# EAGLE board xen_mini (EAGLE 5.10)
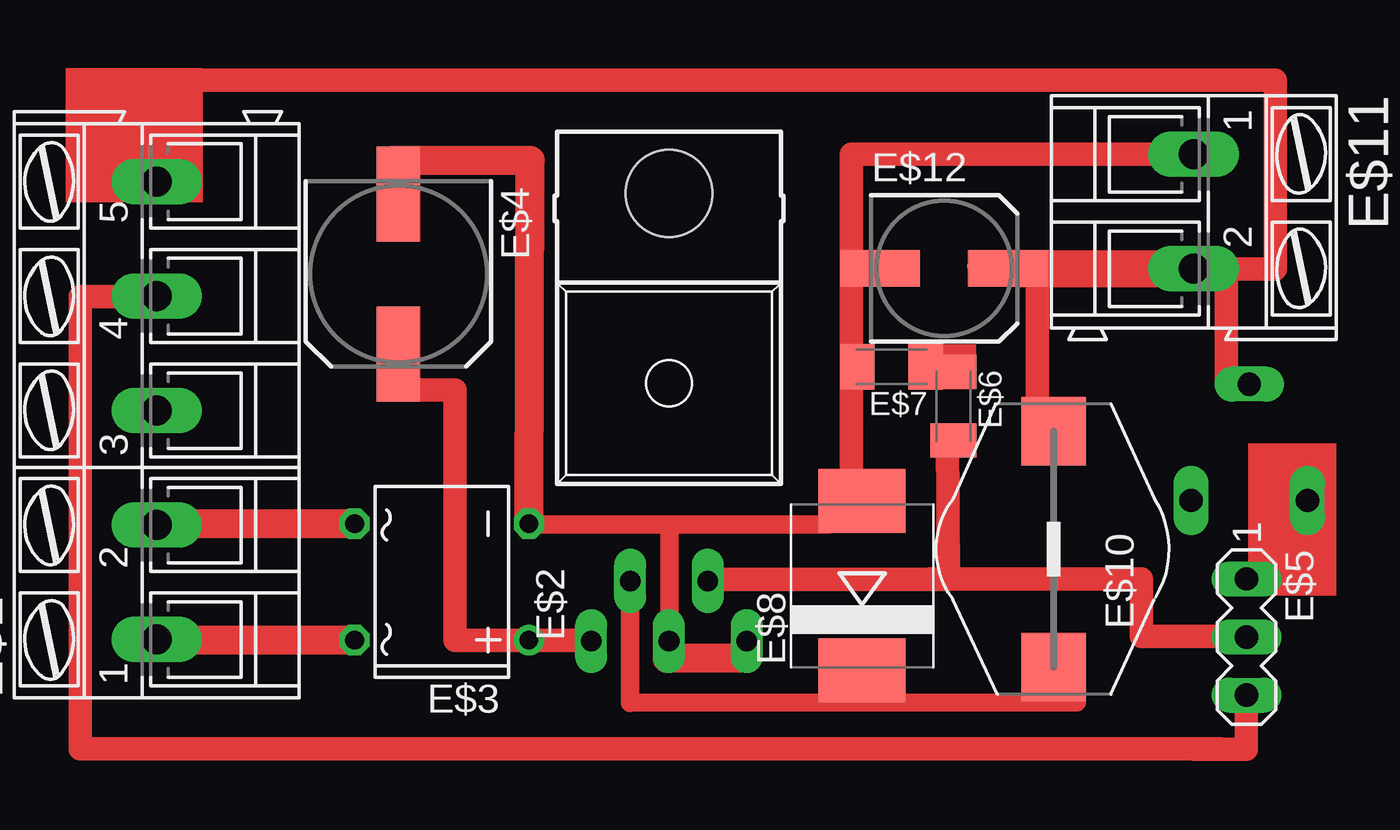
[diagram p0: board, top side]
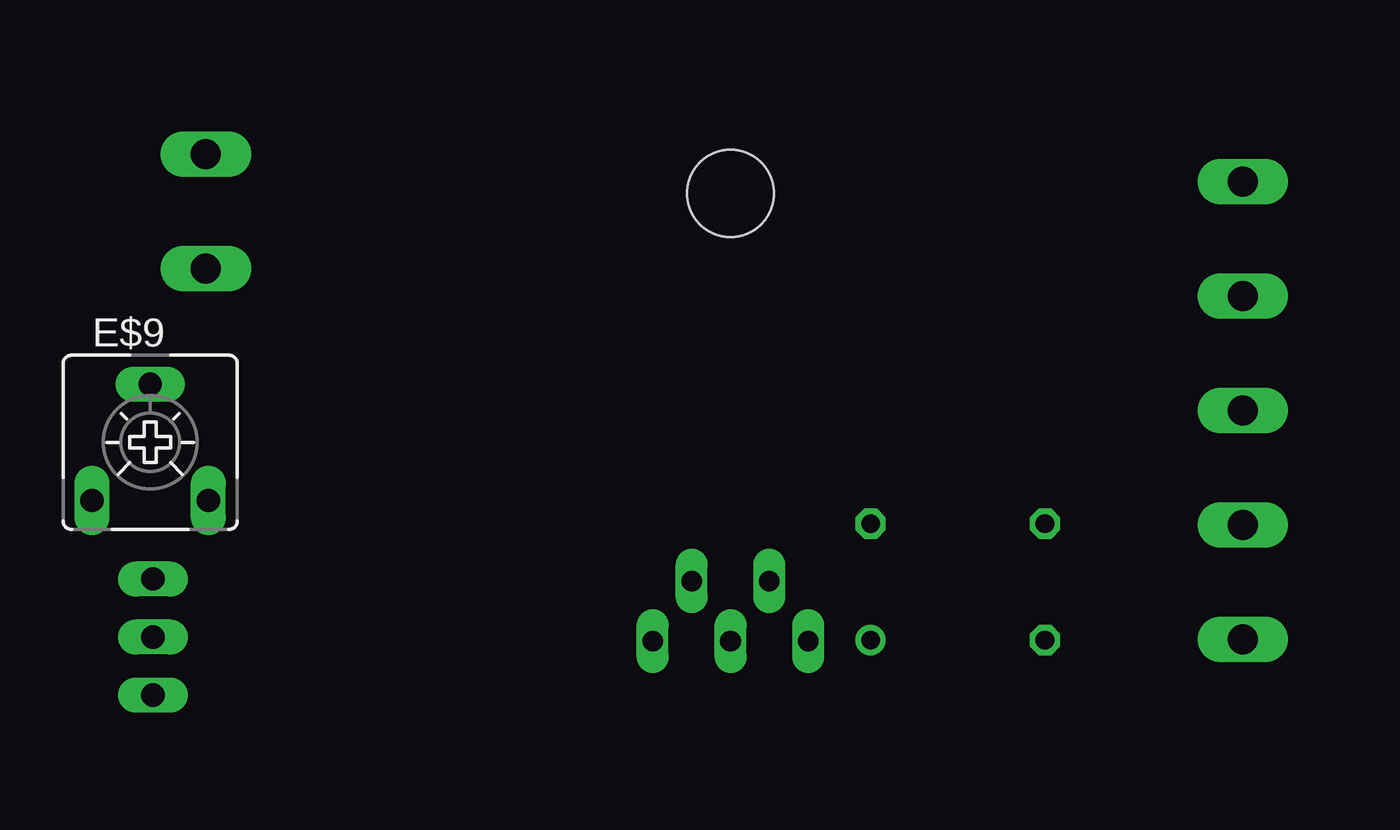
[diagram p1: board, bottom side, seen from below]

No outline drawn. Coordinates in mm, seen from the top.
Copper layers (1*16): Top 0.035mm / dielectric 1.5mm / Bottom 0.035mm
Design rules "default": minimum track width 10mil, minimum drill 24mil, track to track 8mil, track to pad 8mil, pad to pad 8mil, via to via 8mil, smd to smd 8mil, copper to edge 40mil, drill to drill 8mil, minimum pad ring 10mil, minimum via ring 8mil, stop-mask expansion 4mil, vias tented up to drill 0mil, thermal gap 10mil

## Footprints (pad centres in the part's own frame; a part is rotated, then mirrored left to right if it is on the bottom)
AK300/5 = drill 1.321 long: 1 -10.008,0; 2 -5.004,0; 3 0,0; 4 5.004,0; 5 10.008,0
TO220512 = drill 0.9 long: 1 -3.4,-22.37; 2 -1.7,-19.74; 3 0,-22.37; 4 1.7,-19.74; 5 3.4,-22.37 | hole 3.8: 0,-2.8
DB = drill 0.813 round: + -2.54,-3.81 | drill 0.813 octagon: - 2.54,-3.81; AC1 2.54,3.81; AC2 -2.54,3.81
SANYO-OSCON_SMD_E7 = smd 4.15 x 1.9: + 3.5,0; - -3.5,0
MA03-1 = drill 1.016 long: 1 -2.54,0; 2 0,0; 3 2.54,0
C1206K = smd 1.5 x 2: 1 -1.5,0; 2 1.5,0
SMC = smd 2.8 x 3.8: A 3.7,0; C -3.7,0
CA6V = drill 1.016 long: A -2.54,-2.54; E 2.54,-2.54; S 0,2.54
L = smd 3 x 2.8: 1 -5.15,0; 2 5.15,0
AK300/2 = drill 1.321 long: 1 -2.515,0; 2 2.489,0
SANYO-OSCON_SMD_C6 = smd 3.5 x 1.6: + 2.8,0; - -2.8,0

## Placement (x,y rotation side)
E$1  [AK300/5]  6.48,15.73 90 top
E$2  [TO220512]  28.87,28.02 0 top
E$3  [DB]  18.94,8.24 90 top
E$4  [SANYO-OSCON_SMD_E7]  17.05,21.7 270 top
E$5  [MA03-1]  54.11,5.83 270 top
E$6  [C1206K]  41.3,15.92 270 top
E$7  [C1206K]  38.59,17.64 180 top
E$8  [SMC]  37.31,8.07 90 top
E$9  [CA6V]  54.23,14.34 0 bottom
E$10  [L]  45.68,9.67 90 top
E$11  [AK300/2]  51.8,24.42 270 top
E$12  [SANYO-OSCON_SMD_C6]  40.89,21.94 0 top

## Library data of the parts
E$1 E$11 = con-ptr500
E$2 = ref-packages
E$3 = rectifier
E$4 E$6 E$7 E$12 = rcl
E$5 = con-lstb
E$8 = diode
E$9 = pot
E$10 = wuerth-elektronik

## Tracks (layer width: path | path; a pad name or v marks a point on that pad's centre or on a via)
S$1
  Top 1.016: 25.46,5.69 19.53,5.69 19.53,16.63 17.3,16.63
S$2
  Top 0.813: 28.89,5.74 28.89,10.76 | 28.89,10.76 22.63,10.76 | 28.89,10.76 35.84,10.76 35.84,10.78
S$3
  Top 1.27: 22.76,10.83 22.8,26.66 16.81,26.66
S$4
  Top 1.27: 15.13,10.8 15.13,10.78 6.29,10.78 | 15.13,5.69 6.29,5.69
S$5
  Top 1.27: 32.29,5.69 32.29,4.89 28.8,4.89
S$6
  Top 0.813: 27.16,8.32 27.16,2.96 46.7,2.97
S$7
  Top 1.016: 37.39,11.85 36.85,11.85 36.85,22.06
S$8
  Top 1.016: 30.6,8.36 41.08,8.36 41.04,14.66
S$9
  Top 1.016: 44.1,22.24 44.97,21.77 44.97,14.43
S$10
  Top 1.016: 42.41,22.05 43.56,22.05
S$11
  Top 1.016: 36.85,21.8 36.85,26.93 51.85,26.93
S$12
  Top 1.016: 54.22,16.87 53.23,16.87 53.23,21.83
S$13
  Top 1.016: 6.4,20.72 3.15,20.72 3.15,0.95 52.98,0.95
S$14
  Top 1.016: 52.02,21.91 55.36,21.91 55.36,30.16 5.69,30.16 5.69,25.8 6.8,25.8
S$15
  Top 1.016: 54.1,3.32 54.1,0.93 51.8,0.93
S$16
  Top 1.016: 54.1,5.85 49.51,5.85 49.51,8.37 40.28,8.37
(copper drawn outside any net)
  shapes: Top area x4